# Altium PCB 89C51最小系统+心形LED.PcbDoc
Units mil, origin at the board's own origin, x right, y up, seen from the top; angles counter-clockwise.
Board outline 4575.04 x 4159.03 mil, 2 copper layers (Top Layer, Bottom Layer); 49 components, 67 nets, 185 pads, 2 vias.
Unrouted connection lines stored in the file: 1.
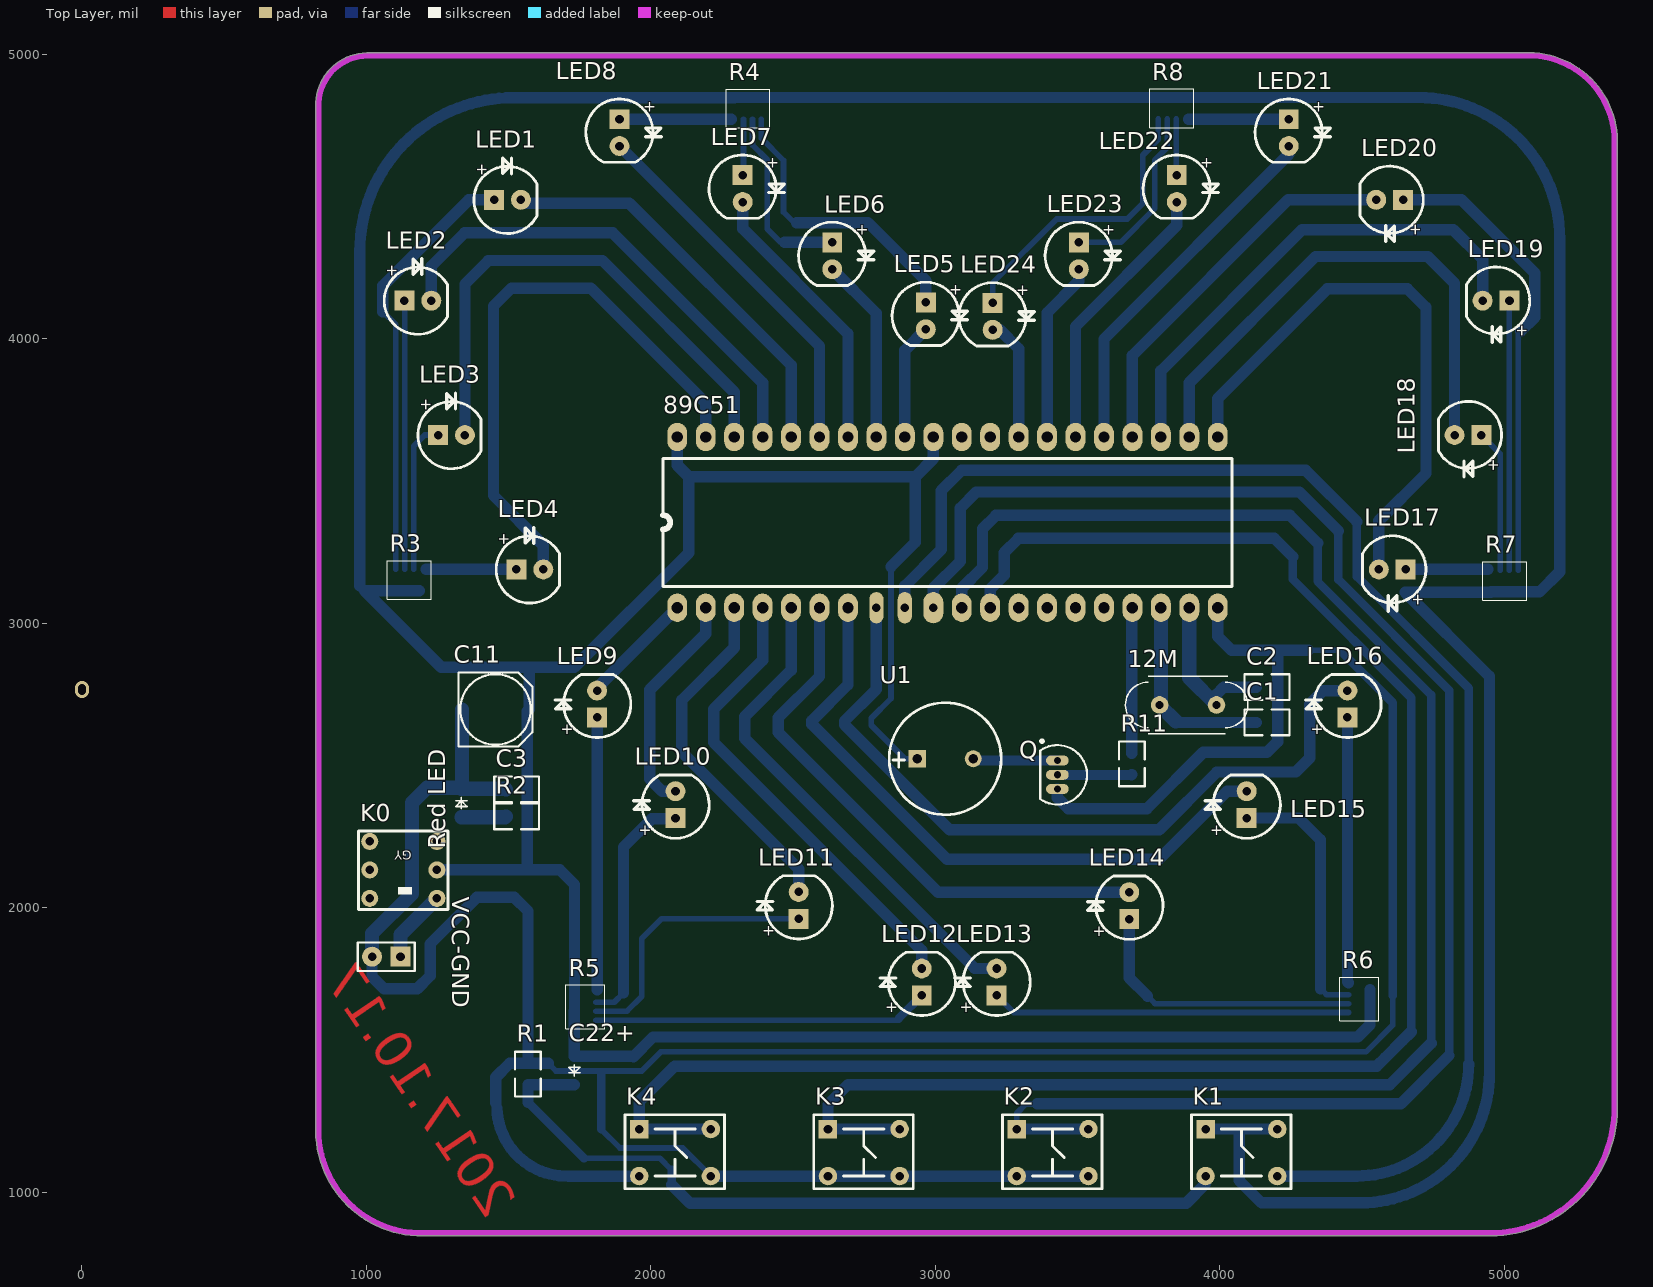
[diagram p0: Top Layer view]
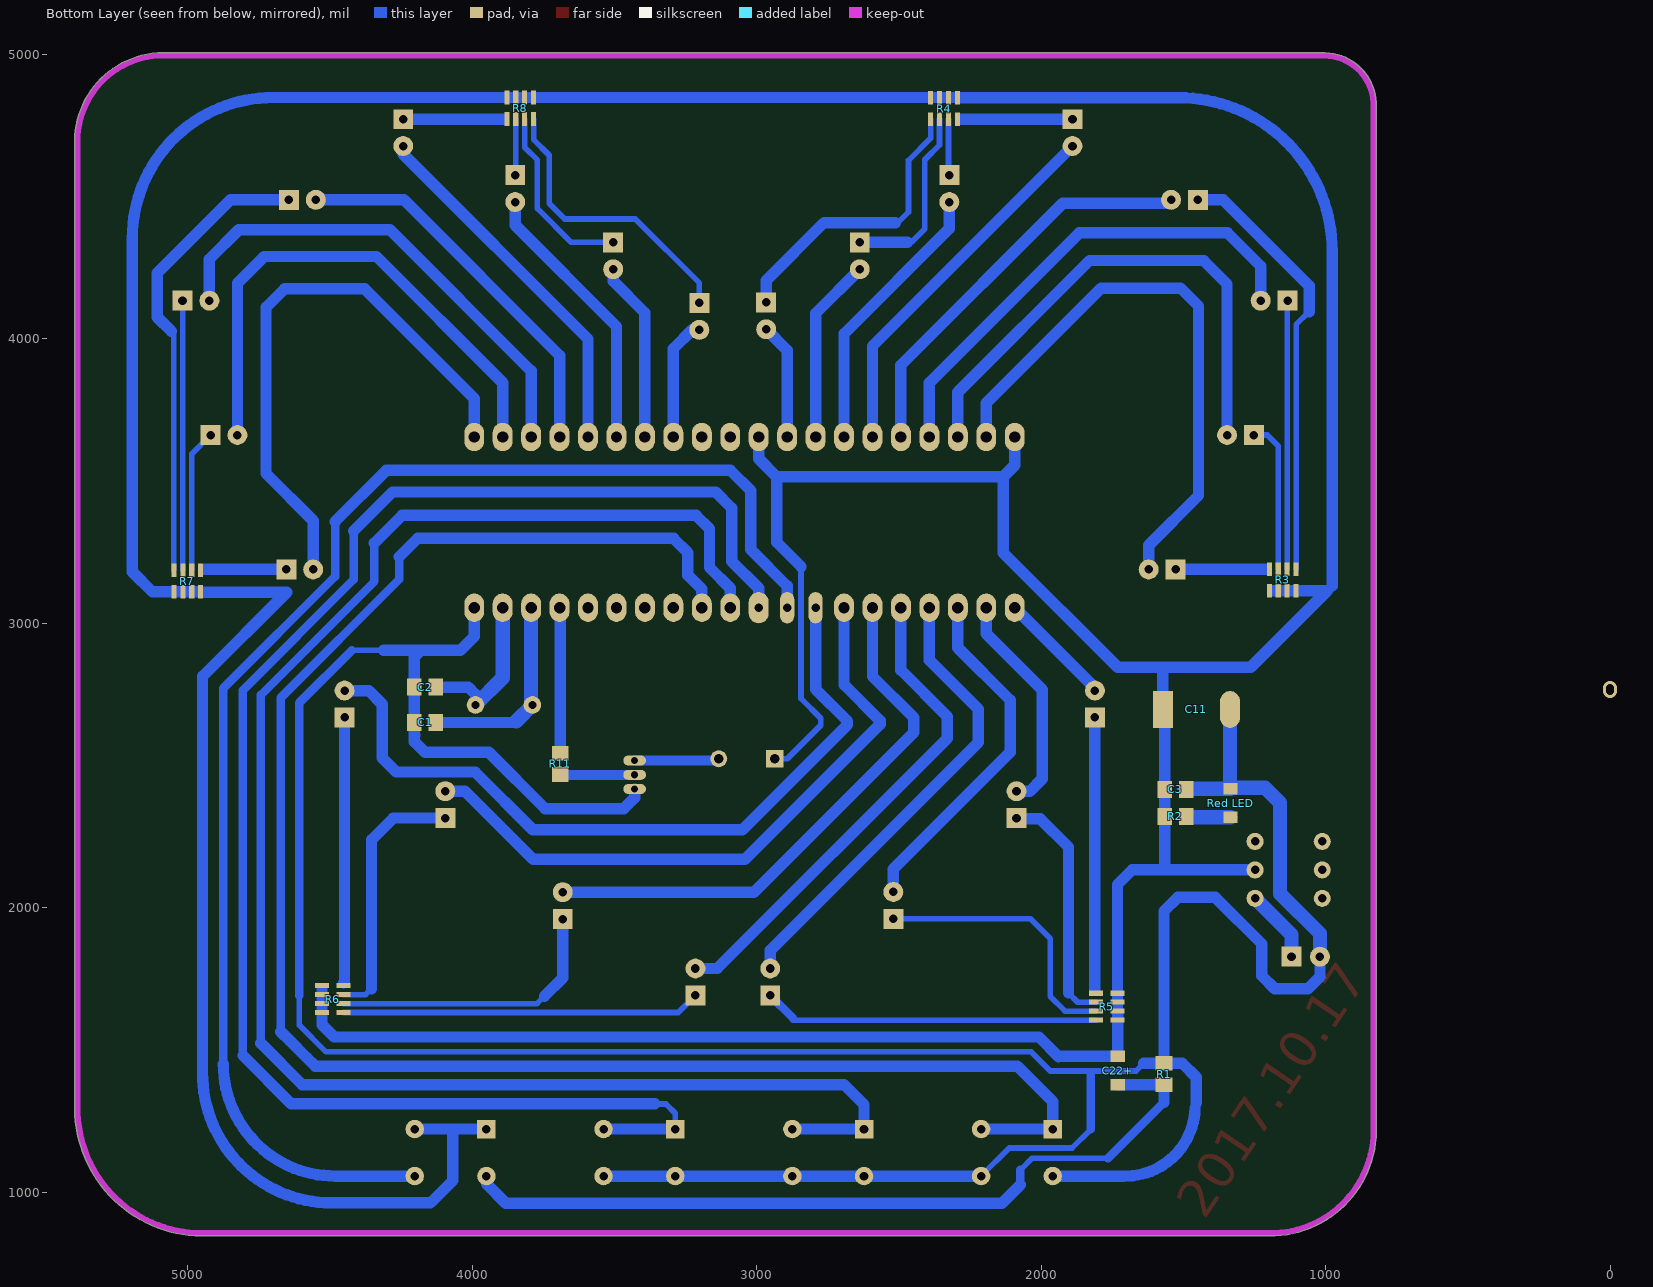
[diagram p1: Bottom Layer view, seen from below]
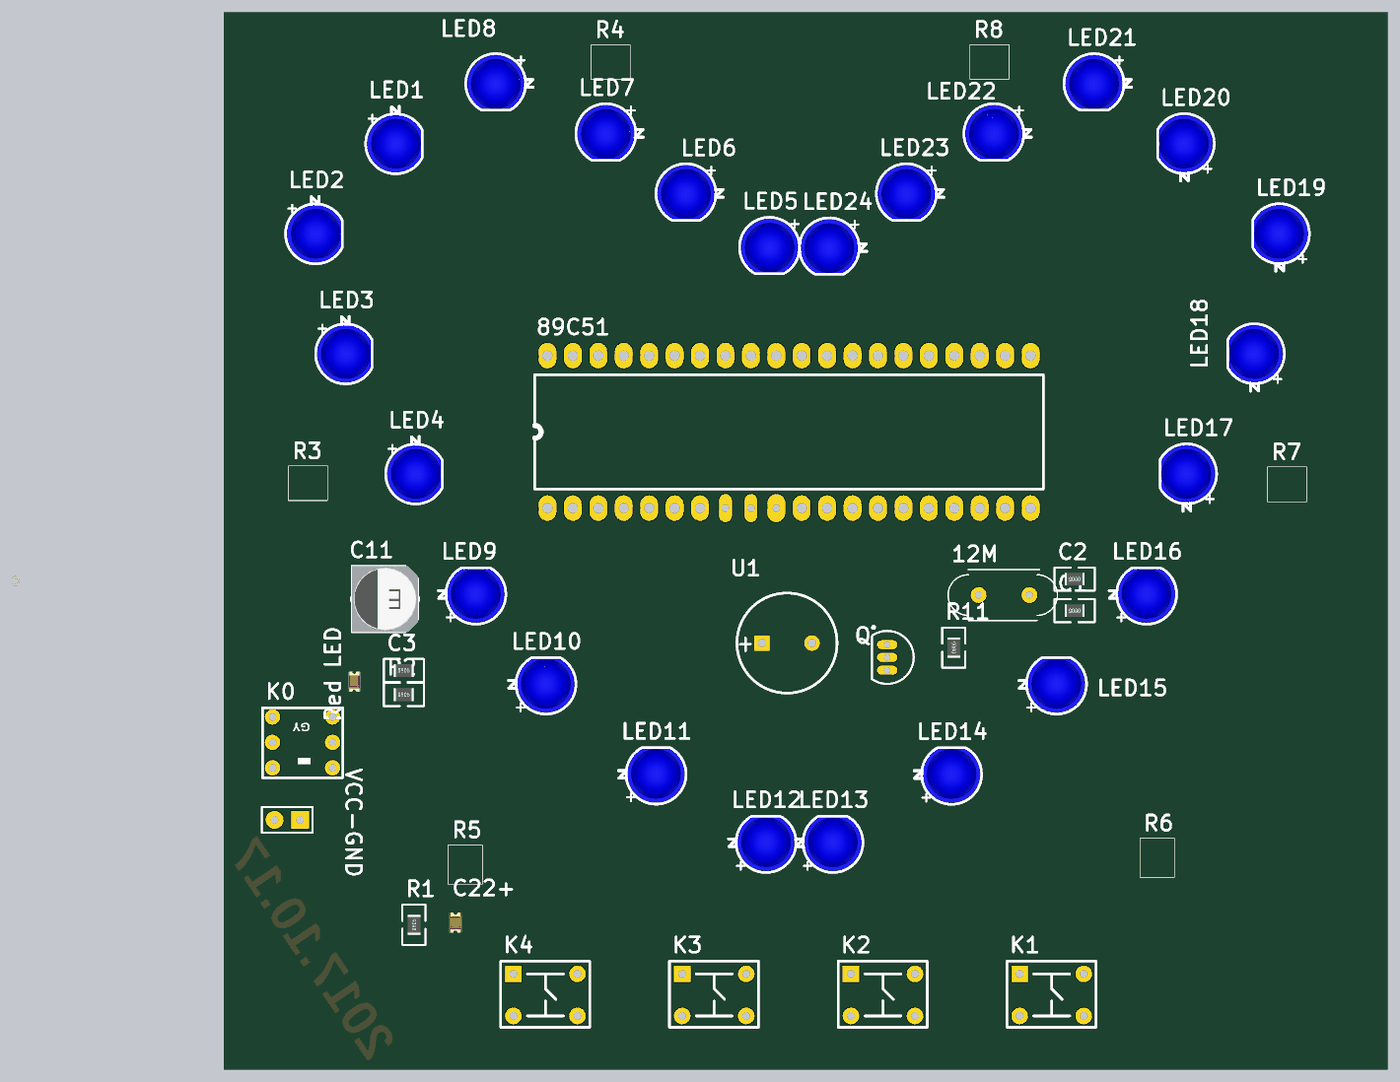
[diagram p2: 3D render of the assembled board from above, using the file's embedded part models]

## Layer stack, top to bottom
Top Solder: solder mask 0.4, Solder Resist, Dk 3.5
Top Layer: signal copper 1.4
Dielectric 1: dielectric 12.6, FR-4, Dk 4.8
Bottom Layer: signal copper 1.4
Bottom Solder: solder mask 0.4, Solder Resist, Dk 3.5

## Board outline
821.99,1213.89 cw(c832,1214) 821.99,1214 821.99,4815.86 cw(c1006,4821) 1000.71,5005.01 cw(c1001,4995) 1001,5005.02 5087,5005.02 cw(c5087,4695) 5397.02,4695 5397.02,1298.07 cw(c4948.49,1294.51) 5397.03,1294.51 cw(c4948.49,1294.51) 4952.08,845.99 cw(c4952,856) 4952,845.99 1198.06,845.99 cw(c1194,1218)

## Design rules (kind name [scope] priority, off if disabled: settings)
Clearance [All] p1: gap=10
PolygonConnect [All] p1: connectstyle=Relief reliefconductorwidth=10 reliefentries=4 polygonreliefangle="90 Angle" airgapwidth=10
RoutingVias [All] p1: holewidth=28 width=50 viastyle="Through Hole" minholewidth=28 minwidth=50 maxholewidth=28 maxwidth=50
SolderMaskExpansion [All] p1: expansion=4
Width [All] p1: maxlimit=40 minlimit=40 preferedwidth=40
30 further rules are at their usual default settings.

## Components (designator, comment, footprint, x,y, rotation, side; value= is the part's Value field where it differs from the comment)
12M "晶振" 晶振 3991.9,2712.45 r0 top
89C51 "89C51" 89C51 2092.9,3054.45 r90 top
C1 "" 0805 4166,2646 r180 top
C2 "" 0805 4166,2770.18 r180 top
C3 "" 0805 1527.88,2420.65 r0 top
C11 "100UF/470UF(封装慎选)" ED6.3 1453.88,2696.65 r180 top
C22+ "10uF" LED(0805) 1731,1427 r270 top
K0 "六脚开关" 按钮开关 1011.88,2032.65 r180 top
K1 "按键" 按键 3951,1224 r0 top
K2 "按键" 按键 3287.33,1224 r0 top
K3 "按键" 按键 2623.67,1224 r0 top
K4 "按键" 按键 1960,1224 r0 top
LED1 "" LED直插 1496.06,4488.19 r270 top
LED2 "" LED直插 1181.1,4133.86 r270 top
LED3 "" LED直插 1299.21,3661.42 r270 top
LED4 "" LED直插 1574.8,3188.98 r270 top
LED5 "" LED直插 2966.53,4080.43 r180 top
LED6 "" LED直插 2637.8,4291.34 r180 top
LED7 "" LED直插 2322.83,4527.56 r180 top
LED8 "" LED直插 1889.76,4724.41 r180 top
LED9 "" LED直插 1811.02,2715.91 r0 top
LED10 "" LED直插 2086.61,2362.2 r0 top
LED11 "" LED直插 2519.68,2007.87 r0 top
LED12 "" LED直插 2952.27,1738.78 r0 top
LED13 "" LED直插 3215.27,1738.78 r0 top
LED14 "" LED直插 3681.9,2007.15 r0 top
LED15 "" LED直插 4094.49,2362.2 r0 top
LED16 "" LED直插 4448.82,2715.91 r0 top
LED17 "" LED直插 4606.3,3188.98 r90 top
LED18 "" LED直插 4872.52,3661.42 r90 top
LED19 "" LED直插 4971.26,4133.86 r90 top
LED20 "" LED直插 4596.93,4488.19 r90 top
LED21 "" LED直插 4242.6,4724.41 r180 top
LED22 "" LED直插 3848.9,4527.56 r180 top
LED23 "" LED直插 3504.57,4291.34 r180 top
LED24 "" LED直插 3201.53,4078.43 r180 top
Q "9013" TO-226-AA 3429,2467 r180 top
R1 "10K" 0805 1563,1415 r90 top
R2 "10K" 0805 1527.88,2325.65 r0 top
R3 "1K" 排阻（4位） 1149,3154 r90 top
R4 "1K" 排阻（4位） 2343,4807 r270 top
R5 "1K" 排阻（4位） 1771.65,1653.54 r0 top
R6 "1K" 排阻（4位） 4488.19,1676.54 r180 top
R7 "1K" 排阻（4位） 5000,3150 r90 top
R8 "1K" 排阻（4位） 3833,4808 r270 top
R11 "1K" 0805 3685.9,2505.45 r90 top
"Red LED" "LED" LED(0805) 1333.88,2367.65 r90 top
U1 "Buzzer(有源蜂鸣器)" Buzzer 3031.5,2523.46 r0 top
VCC-GND "" HDR1X2 1119.88,1827.65 r180 top

## Footprints (in the part's own frame and the unit in brackets; to place one, negate y for a bottom-side part, rotate by r counter-clockwise, add the part's x,y. Pads: shape width x height; smd on the part's side, far side on the other; paste and mask are expansions set on the pad)
89C51 [mil]
  oval 100x70 hole 40: 1(0,0) 2(0,-100) 3(0,-200) 4(0,-300) 5(0,-400) 6(0,-500) 7(0,-600) 11(0,-1000) 12(0,-1100) 13(0,-1200) 14(0,-1300) 15(0,-1400) 16(0,-1500) 17(0,-1600) 18(0,-1700) 19(0,-1800) 20(0,-1900) 21(600,-1900) 22(600,-1800) 23(600,-1700) 24(600,-1600) 25(600,-1500) 26(600,-1400) 27(600,-1300) 28(600,-1200) 29(600,-1100) 30(600,-1000) 31(600,-900) 32(600,-800) 33(600,-700) 34(600,-600) 35(600,-500) 36(600,-400) 37(600,-300) 38(600,-200) 39(600,-100) 40(600,0)
  oval 110x50 hole 30: 8(0,-700) 9(0,-800)
  oval 110x70 hole 30: 10(0,-900)
  silkscreen extent 75,-1950 525,50
0805 [mm]
  rect 1.3x1.5 smd far side: 1(-0.95,-0.127) 2(0.95,-0.127)
  silkscreen extent -2,-1.28 2,1.02, body extent -1,-0.76 1,0.5, height 0.55
Buzzer [mil]
  rect 60x60 hole 32 mask+0: 1(-95,0)
  round 60 hole 32 mask+0: 2(101.85,0)
  silkscreen extent -193,-197 200,197, body extent -236,-236 236,236, height 354
ED6.3 [mil]
  rect 70x130 smd far side: 1(-118.11,0)
  oval 70x130 smd far side: 2(118.11,0)
  silkscreen extent -130,-130 130,130, body extent -138,-130 138,130, height 205
HDR1X2 [mil] "Connector; Header; 2 Position"
  rect 70x70 hole 30: 1(0,0)
  round 70 hole 30: 2(100,0)
  silkscreen extent -50,-50 150,50
LED(0805) [mil]
  rect 40x50 smd far side: 1(-50,0) 2(50,0)
  silkscreen extent -20,-20 20,20, body extent -37,-24 43,25, height 43
LED直插 [mil]
  rect 70x70 hole 30 mask+1.18: 1(0,-47.24)
  round 70 hole 30 mask+1.18: 2(0,47.24)
  silkscreen extent -147,-118 118,104, body extent -112,-111 112,99, height 339
TO-226-AA [mil] "TO, Flat Index; 3 In-Line, Axial Leads; Body Dia. 4.8mm; Leads 0.55 x 0.51 mm (max)"
  oval 80x35 hole 25: 1(0,-50) 2(0,0) 3(0,50)
  silkscreen extent -104,-123 60,104, body extent -105,-105 60,105, height 210
按钮开关 [mil]
  round 60 hole 30: 1(-236.22,0) 2(-236.22,-100) 3(-236.22,-200) 4(0,-200) 5(0,-100) 6(0,0)
  silkscreen extent -276,-236 39,39
按键 [mil]
  rect 65x65 hole 30: 1(-0.98,-2.32)
  round 65 hole 30: 1(250.98,-2.32) 2(-0.98,-167.68) 2(250.98,-167.68)
  silkscreen extent -51,-212 299,48
排阻（4位） [mm]
  rect 1.22x0.45 smd far side: 1(-1.016,1.156) 2(0.904,1.156) 3(-1.016,0.356) 4(0.904,0.356) 5(-1.016,-0.444) 6(0.904,-0.444) 7(-1.016,-1.244) 8(0.904,-1.244)
  silkscreen extent -1.78,-1.99 1.68,1.91
晶振 [mil]
  round 62 hole 28: 1(-3.4,-0.01) 2(-203.4,-0.01)
  silkscreen extent -324,-100 107,100

## Part data
89C51: library part Component_1
C1 C2 C3: library part Cap, "无极电容"
C11: library part 固态贴片电容, "ED8:470UF  ED6.3:100UF"
C22+: library part LED, "发光二极管"
K0: "按钮开关"
LED1 LED2 LED3 LED4 LED5 LED6 LED7 LED8 LED9 LED10 LED11 LED12 LED13 LED14 LED15 LED16 LED17 LED18 LED19 LED20 LED21 LED22 LED23 LED24: library part LED
Q: library part NPN, "NPN Bipolar Transistor"
R1 R2 R11: library part Res, "通用电阻"
R3 R4 R5 R6 R7 R8: library part 排阻（4位）, "排阻（4位）"
"Red LED": "发光二极管"
VCC-GND: library part "Header 2", "Header, 2-Pin"

## Via types
v1: diameter 50, hole 28, Top Layer to Bottom Layer, 2 vias

## Nets (pads, with @x,y where several pads share a name; then routed paths per layer and width w, separated by ;. In a path a pad name is that pad's centre, name@x,y a point inside that pad or via, vN(x,y) a via of type N, cw(c..) or ccw(c..) an arc to the next point about the centre after c; other vN are vias at no path point)
GND: 89C51.20 "Red LED.2" C1.1 C2.1 C3.1 C11.2 K2.2 K3.2 K4.2 Q.3 R1.2 VCC-GND.2 | length 11771.9
  Bottom Layer w20: 1639.6,1452.4 1666,1426 1968,1426 2035,1493 4514,1493 4608,1587 4608,1690 ; 1825,1221 1891,1155 2112.31,1155 K4.2@2210.98,1056.32 ; 4312,2905 4423,2905
  Bottom Layer w30: 1825,1221 1825,1421 ; 4423,2905 4608,2720 4608,1691
  Bottom Layer w40: VCC-GND.2 1019.88,1757.12 1062,1715 1179,1715 1224,1760 1224,1872 1388,2036 1520,2036 1568,1988 R1.2 ; 1455,1313 1455,1404 1503.4,1452.4 R1.2 ; 1459,1295 ccw(c1704.68,1302) 1711.68,1056.32 K4.2@1959.02,1056.32 ; 1639.6,1452.4 R1.2 ; K4.2@2210.98,1056.32 2622.68,1056.32 2874.65,1056.32 3286.35,1056.32 K2.2@3538.32,1056.32 ; Q.3 3429,2386 3467,2348 3744,2348 3942,2546 4166,2546 4203.4,2583.4 C1.1 C2.1 4203.4,2881.6 4180,2905 ; 89C51.20 3992.9,2953.1 4041,2905 4180,2905 ; 4202.4,2606.18 4203.4,2607.18 ; 4312,2905 4180,2905
  Bottom Layer w50: VCC-GND.2 1019.88,1908.65 1159.88,2048.65 1159.88,2368.65 1212.88,2421.65 1334.88,2421.65 1335.77,2422.54 C11.2 ; 1333.88,2417.65 1488.48,2417.65 C3.1
NetK0_1: K0.1 VCC-GND.1 | length 258.1
  Bottom Layer w50: VCC-GND.1 1119.88,1904.43 K0.1
NetLED1_1: LED1.1 R3.2 | length 1531.2
  Bottom Layer w20: 1058,4095 1103.5,4049.5 R3.2
  Bottom Layer w40: 1058,4095 1058,4186 1360.19,4488.19 LED1.1
NetLED2_1: LED2.1 R3.4 | length 944.7
  Bottom Layer w20: LED2.1 1135,4132.72 R3.4
NetLED3_1: LED3.1 R3.6 | length 534.5
  Bottom Layer w20: R3.6 1166.5,3622.5 1205.42,3661.42 LED3.1
NetLED4_1: LED4.1 R3.8 | length 317.9
  Bottom Layer w40: 1209.61,3188.98 LED4.1
NetLED5_1: LED5.1 R4.2 | length 1035.5
  Bottom Layer w20: R4.2 2388.5,4704.5 2466,4627 2466,4445 2503,4408 2512,4408
  Bottom Layer w40: 2512,4408 2763,4408 2966.53,4204.47 LED5.1
NetLED6_1: LED6.1 R4.4 | length 655.4
  Bottom Layer w20: R4.4 2357,4681 2409,4629 2409,4386 2456.42,4338.58 2470,4338.58
  Bottom Layer w40: 2470,4338.58 LED6.1
NetLED7_1: LED7.1 R4.6 | length 197.7
  Bottom Layer w20: LED7.1 2325.5,4577.47 R4.6
NetLED8_1: LED8.1 R4.8 | length 392.2
  Bottom Layer w40: LED8.1 2282,4771.65
NetLED9_1: LED9.1 R5.2 | length 957.7
  Bottom Layer w40: 1811.02,1711 LED9.1
NetLED10_1: LED10.1 R5.4 | length 848
  Bottom Layer w20: R5.4 1871.54,1667.54 1904,1700
  Bottom Layer w40: 1904,1700 1904,2213 2003,2312 2083.65,2312 LED10.1
NetLED11_1: LED11.1 R5.6 | length 965.8
  Bottom Layer w20: R5.6 1916.05,1636.05 1968,1688 1968,1891 2037.63,1960.63 LED11.1
NetLED12_1: LED12.1 R5.8 | length 1181.1
  Bottom Layer w20: R5.8 2865.28,1604.55 2870.73,1610
  Bottom Layer w30: 2870.73,1610 LED12.1
NetLED13_1: LED13.1 R6.2 | length 1262.4
  Bottom Layer w20: LED13.1 3275.76,1631.05 R6.2
NetLED14_1: LED14.1 R6.4 | length 1015
  Bottom Layer w20: 3746,1689 3772.46,1662.54 R6.4
  Bottom Layer w40: LED14.1 3681.9,1753.1 3746,1689
NetLED15_1: LED15.1 R6.6 | length 921.7
  Bottom Layer w20: 4354,1715 4374.96,1694.04 R6.6
  Bottom Layer w40: LED15.1 4277.04,2314.96 4354,2238 4354,1715
NetLED16_1: LED16.1 R6.8 | length 944.7
  Bottom Layer w20: R6.8 4452.6,1736
  Bottom Layer w40: LED16.1 4448.82,1739.78 4452.6,1736
NetLED17_1: LED17.1 R7.2 | length 289.5
  Bottom Layer w40: LED17.1 4943,3188.98
NetLED18_1: LED18.1 R7.4 | length 503.3
  Bottom Layer w20: LED18.1 4986,3595.18 R7.4
NetLED19_1: LED19.1 R7.6 | length 948.7
  Bottom Layer w20: R7.6 5017.5,4132.85 LED19.1
NetLED20_1: LED20.1 R7.8 | length 1641.3
  Bottom Layer w20: R7.8 5048.99,4025.99 5053.24,4030.24
  Bottom Layer w40: LED20.1 4849.81,4488.19 5107,4231 5107,4075.5 5057.5,4025.99
NetLED21_1: LED21.1 R8.2 | length 352.6
  Bottom Layer w40: 3890,4771.65 LED21.1
NetLED22_1: LED22.1 R8.4 | length 198.4
  Bottom Layer w20: R8.4 3847,4576.7 LED22.1
NetLED23_1: LED23.1 R8.6 | length 648.7
  Bottom Layer w20: LED23.1 3651.58,4338.58 3771,4458 3771,4628 3815.5,4672.5 R8.6
NetLED24_1: LED24.1 R8.8 | length 1033.3
  Bottom Layer w20: LED24.1 3201.53,4195.53 3427,4421 3675,4421 3729,4475 3729,4645 3784.01,4700.01 R8.8
NetQ_1: Q.1 U1.2 | length 298.3
  Bottom Layer w35: U1.2@3139.81,2517 Q.1
  Bottom Layer w40: U1.2 U1.2@3139.81,2517
NetQ_2: Q.2 R11.1 | length 262.3
  Bottom Layer w35: Q.2 R11.1@3689.85,2467
  Bottom Layer w40: R11.1@3689.85,2467 R11.1
NetR2_1: "Red LED.1" R2.1 | length 157.8
  Bottom Layer w50: 1333.88,2317.65 1487.48,2317.65 R2.1
P00: 89C51.39 LED4.2 | length 2057.5
  Bottom Layer w40: LED4.2 1622.05,3273.95 1447,3449 1447,4115 1510,4178 1789,4178 2192.9,3774.1 89C51.39
P01: 89C51.38 LED3.2 | length 1861.1
  Bottom Layer w40: LED3.2 1346.46,4192.46 1429,4275 1830,4275 2292.9,3812.1 89C51.38
P02: 89C51.37 LED2.2 | length 1743.3
  Bottom Layer w40: LED2.2 1228.35,4255.35 1345,4372 1866,4372 2392.9,3845.1 89C51.37
P03: 89C51.36 LED1.2 | length 1442.9
  Bottom Layer w40: LED1.2 1555.5,4476 1924,4476 2492.9,3907.1 89C51.36
P04: 89C51.35 LED8.2 | length 1314
  Bottom Layer w40: LED8.2 2592.9,3974.03 89C51.35
P05: 89C51.34 LED7.2 | length 979.2
  Bottom Layer w40: LED7.2 2322.83,4387.17 2692.9,4017.1 89C51.34
P06: 89C51.33 LED6.2 | length 653.9
  Bottom Layer w40: LED6.2 2792.9,4088.99 89C51.33
P07: 89C51.32 LED5.2 | length 409.2
  Bottom Layer w40: 89C51.32 2892.9,3959.56 LED5.2
P10: 89C51.1 LED9.2 | length 405.3
  Bottom Layer w40: LED9.2@1806.31,2767.86 89C51.1
P11: 89C51.2 LED10.2 | length 791.7
  Bottom Layer w40: LED10.2 2039.55,2409.45 1996,2453 1996,2766 2192.9,2962.9 89C51.2
P12: 89C51.3 LED11.2 | length 1245.6
  Bottom Layer w40: 89C51.3 2292.9,2913.9 2109,2730 2109,2546 2519.69,2135.31 LED11.2
P13: 89C51.4 LED12.2 | length 1642.5
  Bottom Layer w40: 89C51.4 2392.9,2869.9 2221,2698 2221,2581 2952.27,1849.73 LED12.2
P14: 89C51.5 LED13.2 | length 1747.3
  Bottom Layer w40: 89C51.5 2492.9,2834.9 2330,2672 2330,2595 3138.98,1786.02 LED13.2
P15: 89C51.6 LED14.2 | length 1965
  Bottom Layer w40: 89C51.6 2592.9,2812.9 2448,2668 2448,2616 3009.61,2054.39 LED14.2
P16: 89C51.7 LED15.2 | length 2286.4
  Bottom Layer w40: 89C51.7 2692.9,2783.9 2566,2657 2566,2645 3041,2170 3786,2170 4025.45,2409.45 LED15.2
P17: 89C51.8 LED16.2 | length 2691.8
  Bottom Layer w20: LED16.2@4448.67,2763 LED16.2
  Bottom Layer w40: 89C51.8 2792.9,2767.9 2681,2656 2681,2643 3050,2274 3787,2274 3990,2477 4267,2477 4316,2526 4316,2715 4364,2763 LED16.2@4448.67,2763
P20: 89C51.21 LED17.2 | length 2043.7
  Bottom Layer w40: 89C51.21 3992.9,3789.9 4378,4175 4660,4175 4725,4110 4725,3526 4559.06,3360.06 LED17.2
P21: 89C51.22 LED18.2 | length 1879.1
  Bottom Layer w40: 89C51.22 3892.9,3844.9 4337,4289 4731,4289 4825.28,4194.72 LED18.2
P22: 89C51.23 LED19.2 | length 1757.9
  Bottom Layer w40: 89C51.23 3792.9,3886.9 4289,4383 4821,4383 4924.02,4279.98 LED19.2
P23: 89C51.24 LED20.2 | length 1369.9
  Bottom Layer w40: 89C51.24 3692.9,3940.9 4240.19,4488.19 LED20.2
P24: 89C51.25 LED21.2 | length 1291.8
  Bottom Layer w40: 89C51.25 3592.9,3998.9 4242.6,4648.6 LED21.2
P25: 89C51.26 LED22.2 | length 973.3
  Bottom Layer w40: 89C51.26 3492.9,4042.9 3848.9,4398.9 LED22.2
P26: 89C51.27 LED23.2 | length 635.9
  Bottom Layer w40: 89C51.27 3392.9,4090.9 3504.57,4202.57 LED23.2
P27: 89C51.28 LED24.2 | length 429.4
  Bottom Layer w40: LED24.2 3226.81,4031.19 3292.9,3965.1 89C51.28
P30: 89C51.10 K2.1 | length 5715.2
  Bottom Layer w20: K2.1@3286.35,1221.68 3286.35,1277.35 3319,1310 3359,1310
  Bottom Layer w30: 4417,3324 4417,3153 4806,2764 4806,2600 4806,1480
  Bottom Layer w40: 89C51.10 2992.9,3122.9 3088,3218 3088,3405 3144,3461 4280,3461 4417,3324 ; K2.1@3286.35,1221.68 K2.1@3538.32,1221.68 ; 3359,1310 4636,1310 4806,1480
P31: 89C51.11 K3.1 | length 6017.2
  Bottom Layer w30: 4344,3282 4344,3147 4743,2748 4743,2611 4743,1523
  Bottom Layer w40: K3.1@2874.65,1221.68 2622.68,1221.68 2622.68,1307.68 2693,1378 4598,1378 4743,1523 ; 89C51.11 3092.9,3122.9 3166,3196 3166,3332 3213,3379 4247,3379 4344,3282
P32: 89C51.12 K4.1 | length 6282
  Bottom Layer w30: 4257,3233 4257,3154 4673,2738 4673,2616 4673,1564
  Bottom Layer w40: K4.1@2210.98,1221.68 1959.02,1221.68 1959.02,1318.02 2084,1443 4552,1443 4582.25,1473.25 4642.75,1533.75 4673,1564 ; 89C51.12 3192.9,3119.9 3242,3169 3242,3248 3292,3298 4192,3298 4257,3233
P33: 89C51.13
P34: 89C51.14
P35: 89C51.15
P36: 89C51.16
P37: 89C51.17 R11.2 | length 512.4
  Bottom Layer w40: R11.2 3690.9,3052.45 89C51.17
PROG: 89C51.30
PSEN: 89C51.29
RST: 89C51.9 C22+.2 K1.2 R1.1 | length 7836.9
  Bottom Layer w20: 1765,1119 2032,1119 2073,1078
  Bottom Layer w30: 1568,1316 1765,1119 ; 2073,1026 2073,1078 ; 4482,3357 4482,3164 4875,2771 4875,2565 4875,1450
  Bottom Layer w40: 1568,1316 R1.1 1568.6,1377 C22+.2 ; 2073,1026 2138,961 3882,961 3950.02,1029.02 K1.2@3950.02,1056.32 ; 89C51.9 2892.9,3130.9 3021,3259 3021,3466 3092,3537 4302,3537 4482,3357 ; K1.2@4201.98,1056.32 4481.32,1056.32 ccw(c4481.32,1450) 4875,1450
VCC: 89C51.31 89C51.40 C3.2 C11.1 C22+.1 K0.2 K1.1 R2.2 R3.1 R3.3 R3.5 R3.7 R4.1 R4.3 R4.5 R4.7 R5.1 R5.3 R5.5 R5.7 R6.1 R6.3 R6.5 R6.7 R7.1 R7.3 R7.5 R7.7 R8.1 R8.3 R8.5 R8.7 U1.1 | length 20096.2
  Bottom Layer w20: 977,3131 994,3114 ; 2844,3199 2844,2735 2775,2666 2775,2641 2892.54,2523.46 U1.1
  Bottom Layer w40: 977,3131 977,4308 cw(c1516,4308) 1516,4847 R4.7 2295.01,4848 R8.7 R8.5 R8.3 R8.1 4700,4848 cw(c4700,4353) 5195,4353 5195,3181 5124,3110 R7.7 R7.5 R7.3 R7.1 4953.5,3109 4652,3109 4948,2813 4948,1414 ; R3.1 994,3114 1263,2845 1568,2845 ; 1116,3114 R3.3 R3.5 1186,3114 ; K0.2 1561,2132.65 ; C11.1@1565.28,2689.95 C3.2 R2.2 1565.28,2136.94 1561,2132.65 ; C11.1 1571.99,2841.01 1568,2845 ; R5.5@1731,1635.39 C22+.1 1938,1477 1939,1476 2008,1545 4485,1545 4528.19,1588.19 R6.1 R6.3 R6.5 4528.19,1712 ; R5.5 R5.3 R5.1 1731.65,2081.35 1680.35,2132.65 1561,2132.65 ; 89C51.40 2092.9,3555.1 2133,3515 ; 2844,3199 2930,3285 2930,3515 ; 89C51.31 2992.9,3577.9 2930,3515 ; K1.1@3950.02,1221.68 4068,1221.68 ; K1.1@4201.98,1221.68 4068,1221.68 ; 4948,1419 cw(c4493.5,1416.5) 4496,962 4147,962 4068,1041 4068,1221.68 ; 1568,2845 1731,2845 2133,3247 2133,3515 ; 2133,3515 2930,3515
XTA1: 12M.2 89C51.18 C1.2 | length 709.4
  Bottom Layer w40: 3845.47,2655.47 3849.94,2651 C1.2
  Bottom Layer w50: 89C51.18 3792.9,2716.84 12M.2 3845.47,2655.47
XTA2: 12M.1 89C51.19 C2.2 | length 569.4
  Bottom Layer w40: 12M.1 3988.5,2749.5 4014.18,2775.18 C2.2
  Bottom Layer w50: 89C51.19 3892.9,2808.04 12M.1
pads on no net: K0.3 K0.4 K0.5 K0.6
copper on no net:
  other v1: 0,2762 0,2772

## Keep-outs
Keep-Out Layer:
  lines w20: 1190,856 4952,856 ccw(c4948.49,1294.51) 5387,1298.03 5387,4695 ccw(c5087,4695) 5087,4995 1001,4995 ccw(c1006,4821) 832,4816 832,1214 ccw(c1194,1218) 1198,856

## Other copper
Top Layer:
  text "2017.10.17" at 1390,874 h225 r304.18

## Text inside footprints (layer, text, board x,y; h text height)
K0: Top Overlay "GY" at 1159.52,2209.82 h55 r180
LED1: Top Overlay "+" at 1388.87,4616.85 h39.37 r270
LED2: Top Overlay "+" at 1073.91,4262.52 h39.37 r270
LED3: Top Overlay "+" at 1192.02,3790.08 h39.37 r270
LED4: Top Overlay "+" at 1467.61,3317.64 h39.37 r270
LED5: Top Overlay "+" at 3095.19,4187.63 h39.37 r180
LED6: Top Overlay "+" at 2766.46,4398.53 h39.37 r180
LED7: Top Overlay "+" at 2451.5,4634.75 h39.37 r180
LED8: Top Overlay "+" at 2018.43,4831.6 h39.37 r180
LED9: Top Overlay "+" at 1682.36,2608.71 h39.37
LED10: Top Overlay "+" at 1957.95,2255.01 h39.37
LED11: Top Overlay "+" at 2391.02,1900.68 h39.37
LED12: Top Overlay "+" at 2823.6,1631.59 h39.37
LED13: Top Overlay "+" at 3086.6,1631.59 h39.37
LED14: Top Overlay "+" at 3553.23,1899.96 h39.37
LED15: Top Overlay "+" at 3965.82,2255.01 h39.37
LED16: Top Overlay "+" at 4320.16,2608.71 h39.37
LED17: Top Overlay "+" at 4713.49,3060.31 h39.37 r90
LED18: Top Overlay "+" at 4979.71,3532.75 h39.37 r90
LED19: Top Overlay "+" at 5078.45,4005.2 h39.37 r90
LED20: Top Overlay "+" at 4704.12,4359.53 h39.37 r90
LED21: Top Overlay "+" at 4371.26,4831.6 h39.37 r180
LED22: Top Overlay "+" at 3977.56,4634.75 h39.37 r180
LED23: Top Overlay "+" at 3633.23,4398.53 h39.37 r180
LED24: Top Overlay "+" at 3330.19,4185.63 h39.37 r180